# Altium PCB STM32F302VC_EVM.PcbDoc (part 11 of 19)
Units mil, origin at the board's own origin, x right, y up, seen from the top; angles counter-clockwise.
Board outline 3937.01 x 3937.01 mil, 2 copper layers (Top Layer, Bottom Layer); 117 components, 166 nets, 602 pads, 373 vias.
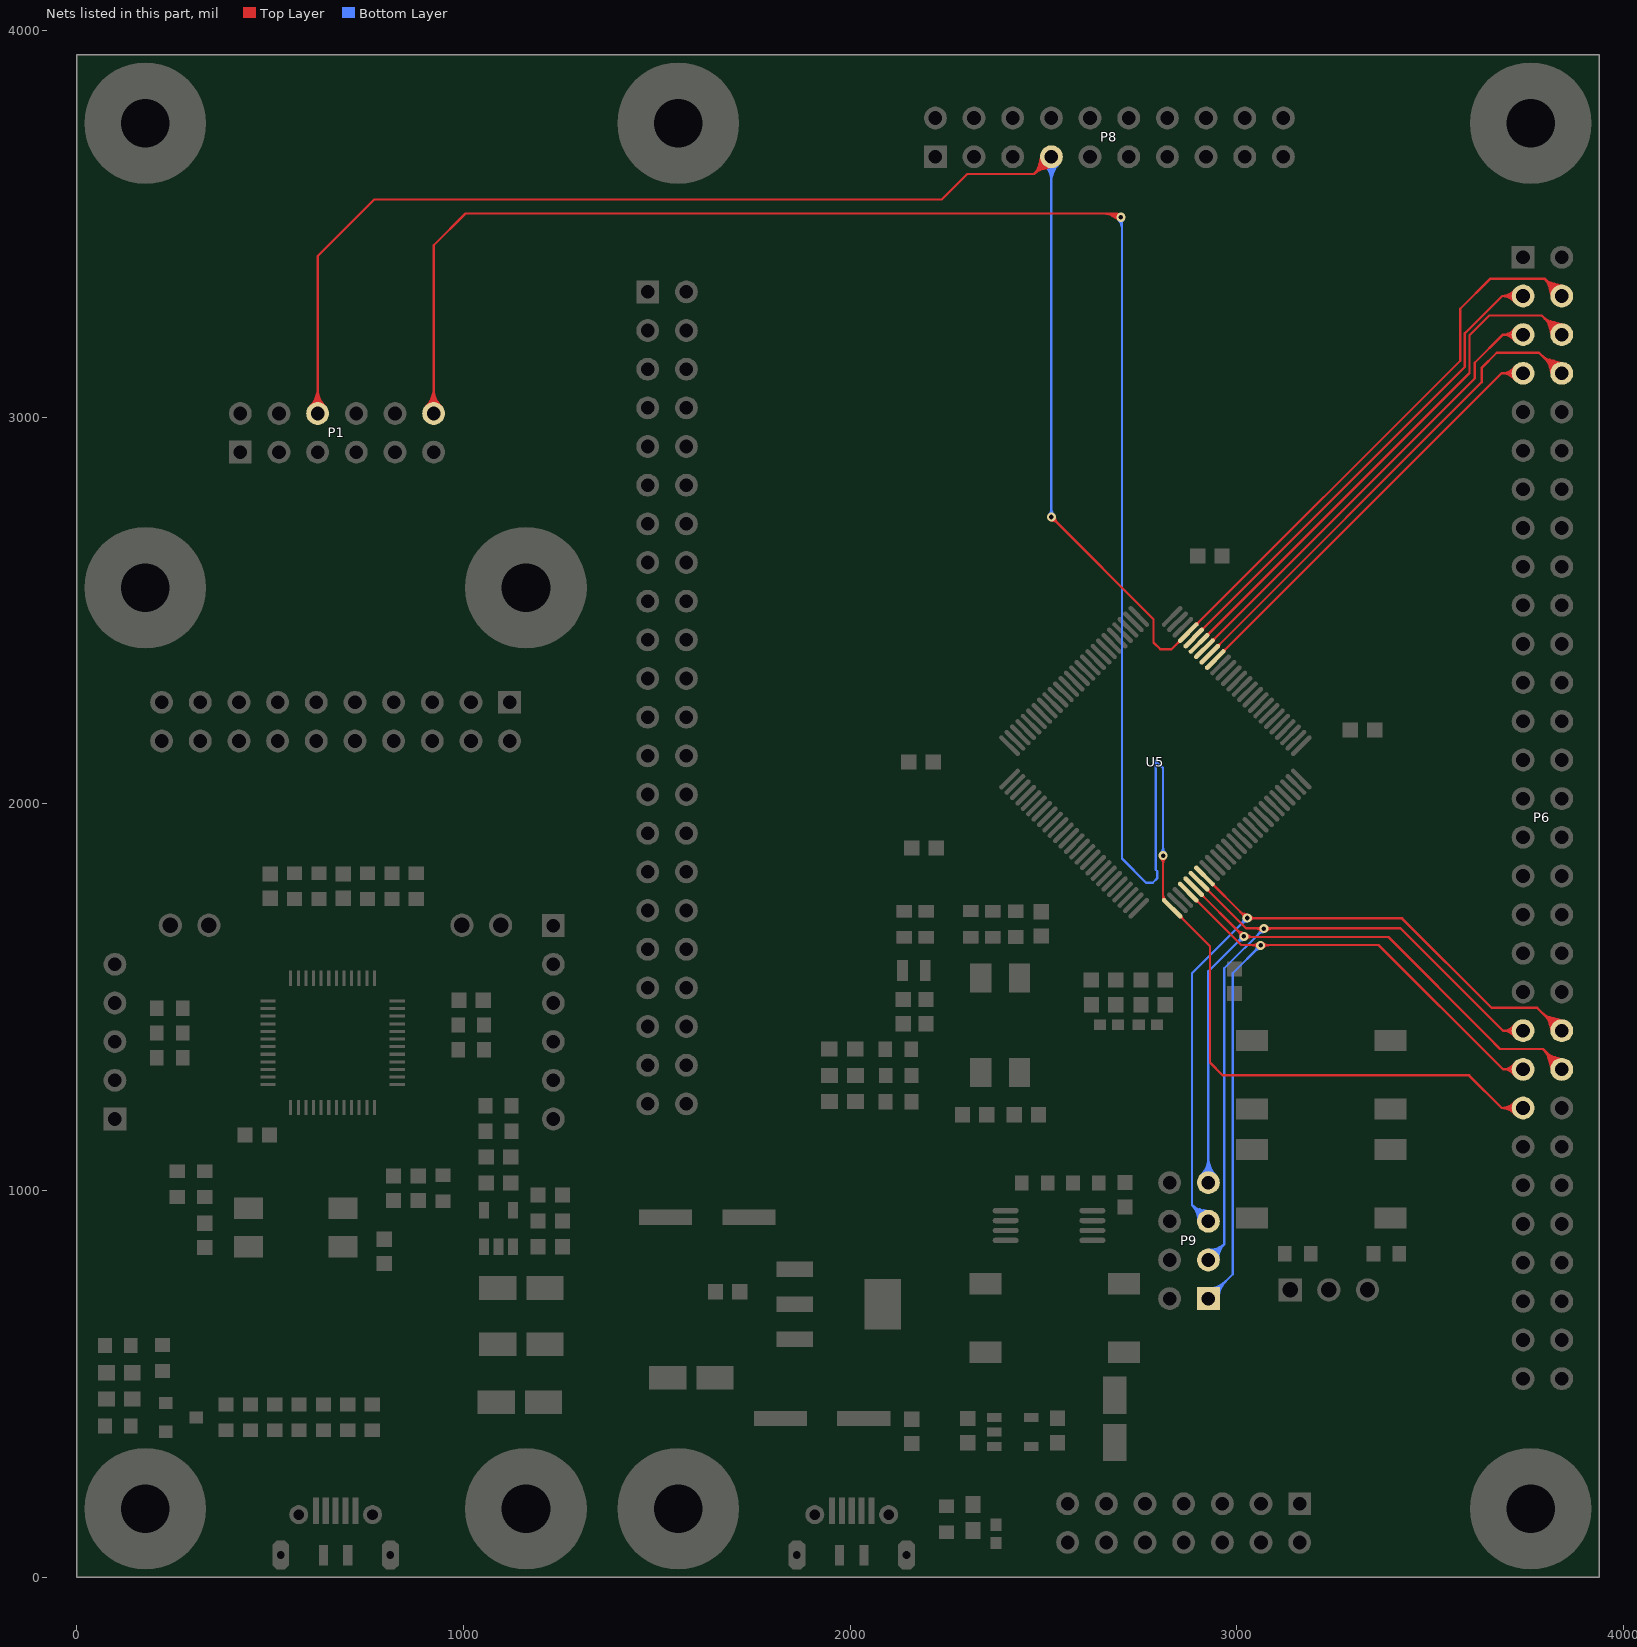
[diagram p11: the nets of this part, all layers, seen from the top]

## Via types
v1: diameter 23.62, hole 11.81, Top Layer to Bottom Layer, tented both sides, 372 vias
v2: diameter 50, hole 28, Top Layer to Bottom Layer, tented both sides, 1 vias

## Nets (pads, with @x,y where several pads share a name; then routed paths per layer and width w, separated by ;. In a path a pad name is that pad's centre, name@x,y a point inside that pad or via, vN(x,y) a via of type N, cw(c..) or ccw(c..) an arc to the next point about the centre after c; other vN are vias at no path point) (continued)
PA3: P1.12 P6.45 U5.26 | length 8220.1
  Top Layer w6: P1.12@922.83,3009.45 922.83,3444.49 1004.92,3526.57 2690.26,3526.57 ; v1(2699.93,3516.9) 2690.26,3526.57 ; v1(2809.06,1866.14) 2809.06,1753.53 U5.26@2832.52,1730.07 2930.68,1631.9 2930.68,1330.86 2963.73,1297.81 3600.57,1297.81 3685,1213.39 ; P6.45@3740.16,1213.39 3685,1213.39 ; P1.12@904.08,3028.21 ccw(c858.79,3073.49) 922.83,3073.49 ; P1.12@904.08,3028.21 ccw(c858.79,3073.49) 922.83,3073.49 ; P1.12@904.08,3028.21 ccw(c858.79,3073.49) 922.83,3073.49 ; P1.12@908.32,3023.96 ccw(c873.28,3059.01) 922.83,3059.01 ; P1.12@908.32,3023.96 ccw(c873.28,3059.01) 922.83,3059.01 ; P1.12@908.32,3023.96 ccw(c873.28,3059.01) 922.83,3059.01 ; P1.12@912.56,3019.72 ccw(c887.76,3044.52) 922.83,3044.52 ; P1.12@912.56,3019.72 ccw(c887.76,3044.52) 922.83,3044.52 ; P1.12@912.56,3019.72 ccw(c887.76,3044.52) 922.83,3044.52 ; 922.83,3044.52 ccw(c957.91,3044.52) P1.12@933.11,3019.72 ; 922.83,3044.52 ccw(c957.91,3044.52) P1.12@933.11,3019.72 ; 922.83,3044.52 ccw(c957.91,3044.52) P1.12@933.11,3019.72 ; 922.83,3059.01 ccw(c972.39,3059.01) P1.12@937.35,3023.96 ; 922.83,3059.01 ccw(c972.39,3059.01) P1.12@937.35,3023.96 ; 922.83,3059.01 ccw(c972.39,3059.01) P1.12@937.35,3023.96 ; 922.83,3073.49 ccw(c986.88,3073.49) P1.12@941.59,3028.21 ; 922.83,3073.49 ccw(c986.88,3073.49) P1.12@941.59,3028.21 ; 922.83,3073.49 ccw(c986.88,3073.49) P1.12@941.59,3028.21 ; 2655.32,3526.57 cw(c2655.32,3472.28) v1@2693.7,3510.67 ; 2655.32,3526.57 cw(c2655.32,3472.28) v1@2693.7,3510.67 ; 2655.32,3526.57 cw(c2655.32,3472.28) v1@2693.7,3510.67 ; 2669.8,3526.57 cw(c2669.8,3486.77) v1@2697.95,3514.92 ; 2669.8,3526.57 cw(c2669.8,3486.77) v1@2697.95,3514.92 ; 2669.8,3526.57 cw(c2669.8,3486.77) v1@2697.95,3514.92 ; 2675.77,3521.65 ccw(c2683.71,3534.63) v1@2693.99,3523.4 ; 2675.77,3521.65 ccw(c2683.71,3534.63) v1@2693.99,3523.4 ; 2675.77,3521.65 ccw(c2683.71,3534.63) v1@2693.99,3523.4 ; 2681.46,3524.43 ccw(c2688.41,3536.47) v1@2695.46,3524.5 ; 2681.46,3524.43 ccw(c2688.41,3536.47) v1@2695.46,3524.5 ; 2681.46,3524.43 ccw(c2688.41,3536.47) v1@2695.46,3524.5 ; 2682.57,3517.49 ccw(c2689.31,3528.51) v1@2698.04,3518.98 ; 2682.57,3517.49 ccw(c2689.31,3528.51) v1@2698.04,3518.98 ; 2682.57,3517.49 ccw(c2689.31,3528.51) v1@2698.04,3518.98 ; 2684.29,3526.57 cw(c2684.29,3501.26) v1@2702.19,3519.16 ; 2684.29,3526.57 cw(c2684.29,3501.26) v1@2702.19,3519.16 ; 2684.29,3526.57 cw(c2684.29,3501.26) v1@2702.19,3519.16 ; 2685.83,3521.91 cw(c2679.83,3511.52) v1@2691.42,3514.62 ; 2685.83,3521.91 cw(c2679.83,3511.52) v1@2691.42,3514.62 ; 2685.83,3521.91 cw(c2679.83,3511.52) v1@2691.42,3514.62 ; 2690.26,3526.57 cw(c2685.87,3522.18) v1@2691.69,3520 ; 2690.26,3526.57 ccw(c2694.65,3530.96) v1@2696.84,3525.15 ; 2690.26,3526.57 ccw(c2694.65,3530.96) v1@2696.84,3525.15 ; 2690.26,3526.57 cw(c2685.87,3522.18) v1@2691.69,3520 ; 2690.26,3526.57 ccw(c2694.65,3530.96) v1@2696.84,3525.15 ; 2690.26,3526.57 cw(c2685.87,3522.18) v1@2691.69,3520 ; v1@2802.82,1859.91 cw(c2787.78,1844.87) 2809.06,1844.87 ; v1@2802.82,1859.91 cw(c2787.78,1844.87) 2809.06,1844.87 ; v1@2802.82,1859.91 cw(c2787.78,1844.87) 2809.06,1844.87 ; 2809.06,1764.2 ccw(c2824.9,1764.2) U5.26@2813.7,1753 ; 2809.06,1764.2 ccw(c2824.9,1764.2) U5.26@2813.7,1753 ; 2809.06,1764.2 ccw(c2824.9,1764.2) U5.26@2813.7,1753 ; 2809.06,1844.87 cw(c2830.33,1844.87) v1@2815.29,1859.91 ; 2809.06,1844.87 cw(c2830.33,1844.87) v1@2815.29,1859.91 ; 2809.06,1844.87 cw(c2830.33,1844.87) v1@2815.29,1859.91 ; U5.26@2809.62,1753.03 ccw(c2806.37,1756.37) 2810.41,1758.7 ; U5.26@2809.62,1753.03 ccw(c2806.37,1756.37) 2810.41,1758.7 ; U5.26@2809.62,1753.03 ccw(c2806.37,1756.37) 2810.41,1758.7 ; U5.26@2853.4,1706.28 cw(c2853.4,1699.27) 2858.36,1704.23 ; U5.26@2853.4,1706.28 cw(c2853.4,1699.27) 2858.36,1704.23 ; U5.26@2853.4,1706.28 cw(c2853.4,1699.27) 2858.36,1704.23 ; U5.26@2856.3,1709.19 ccw(c2863.32,1709.19) 2858.36,1704.23 ; U5.26@2856.3,1709.19 ccw(c2863.32,1709.19) 2858.36,1704.23 ; U5.26@2856.3,1709.19 ccw(c2863.32,1709.19) 2858.36,1704.23 ; 3685,1213.39 cw(c3685,1169.31) P6.45@3719.43,1196.82 ; 3685,1213.39 ccw(c3685,1257.46) P6.45@3719.43,1229.95 ; 3685,1213.39 ccw(c3685,1257.46) P6.45@3719.43,1229.95 ; 3685,1213.39 cw(c3685,1169.31) P6.45@3719.43,1196.82 ; 3685,1213.39 ccw(c3685,1257.46) P6.45@3719.43,1229.95 ; 3685,1213.39 cw(c3685,1169.31) P6.45@3719.43,1196.82 ; 3697.48,1213.39 cw(c3697.48,1179.28) P6.45@3724.12,1200.57 ; 3697.48,1213.39 ccw(c3697.48,1247.49) P6.45@3724.12,1226.2 ; 3697.48,1213.39 ccw(c3697.48,1247.49) P6.45@3724.12,1226.2 ; 3697.48,1213.39 cw(c3697.48,1179.28) P6.45@3724.12,1200.57 ; 3697.48,1213.39 ccw(c3697.48,1247.49) P6.45@3724.12,1226.2 ; 3697.48,1213.39 cw(c3697.48,1179.28) P6.45@3724.12,1200.57 ; 3709.95,1213.39 cw(c3709.95,1189.25) P6.45@3728.81,1204.32 ; 3709.95,1213.39 ccw(c3709.95,1237.53) P6.45@3728.81,1222.46 ; 3709.95,1213.39 ccw(c3709.95,1237.53) P6.45@3728.81,1222.46 ; 3709.95,1213.39 cw(c3709.95,1189.25) P6.45@3728.81,1204.32 ; 3709.95,1213.39 ccw(c3709.95,1237.53) P6.45@3728.81,1222.46 ; 3709.95,1213.39 cw(c3709.95,1189.25) P6.45@3728.81,1204.32
  Bottom Layer w6: v1(2699.93,3516.9) 2700.75,3517.72 2702.76,3515.71 2702.76,1858.36 2765,1796.12 2782.24,1796.12 2794.43,1808.31 2794.43,1825.55 2790.35,1829.63 2790.35,2111.38 2809.06,2092.68 v1(2809.06,1866.14) ; v1@2693.7,3510.67 cw(c2671.85,3488.82) 2702.76,3488.82 ; v1@2693.7,3510.67 cw(c2671.85,3488.82) 2702.76,3488.82 ; v1@2693.7,3510.67 cw(c2671.85,3488.82) 2702.76,3488.82 ; v1@2697.95,3514.92 cw(c2686.34,3503.31) 2702.76,3503.31 ; v1@2697.95,3514.92 cw(c2686.34,3503.31) 2702.76,3503.31 ; v1@2697.95,3514.92 cw(c2686.34,3503.31) 2702.76,3503.31 ; 2702.76,3502.44 cw(c2714.4,3502.44) v1@2706.17,3510.67 ; 2702.76,3502.44 cw(c2714.4,3502.44) v1@2706.17,3510.67 ; 2702.76,3502.44 cw(c2714.4,3502.44) v1@2706.17,3510.67 ; v1@2802.82,1872.37 ccw(c2787.78,1887.41) 2809.06,1887.41 ; v1@2802.82,1872.37 ccw(c2787.78,1887.41) 2809.06,1887.41 ; v1@2802.82,1872.37 ccw(c2787.78,1887.41) 2809.06,1887.41 ; 2809.06,1887.41 ccw(c2830.33,1887.41) v1@2815.29,1872.37 ; 2809.06,1887.41 ccw(c2830.33,1887.41) v1@2815.29,1872.37 ; 2809.06,1887.41 ccw(c2830.33,1887.41) v1@2815.29,1872.37
PA4: P6.43 P9.1 U5.29 | length 3440.3
  Top Layer w6: U5.29@2874.28,1771.83 3011.26,1634.84 3366.54,1634.84 3687.99,1313.39 ; P6.43@3740.16,1313.39 3687.99,1313.39 ; U5.29@2895.16,1748.04 cw(c2895.16,1741.03) 2900.12,1745.99 ; U5.29@2895.16,1748.04 cw(c2895.16,1741.03) 2900.12,1745.99 ; U5.29@2895.16,1748.04 cw(c2895.16,1741.03) 2900.12,1745.99 ; U5.29@2898.06,1750.95 ccw(c2905.08,1750.95) 2900.12,1745.99 ; U5.29@2898.06,1750.95 ccw(c2905.08,1750.95) 2900.12,1745.99 ; U5.29@2898.06,1750.95 ccw(c2905.08,1750.95) 2900.12,1745.99 ; 3037.72,1634.84 cw(c3037.72,1610.48) v1@3054.94,1627.71 ; 3037.72,1634.84 cw(c3037.72,1610.48) v1@3054.94,1627.71 ; 3037.72,1634.84 cw(c3037.72,1610.48) v1@3054.94,1627.71 ; 3042.09,1634.84 ccw(c3042.09,1653.03) v1@3054.94,1640.17 ; 3042.09,1634.84 ccw(c3042.09,1653.03) v1@3054.94,1640.17 ; 3042.09,1634.84 ccw(c3042.09,1653.03) v1@3054.94,1640.17 ; v1@3067.4,1627.71 cw(c3084.63,1610.48) 3084.63,1634.84 ; v1@3067.4,1627.71 cw(c3084.63,1610.48) 3084.63,1634.84 ; v1@3067.4,1627.71 cw(c3084.63,1610.48) 3084.63,1634.84 ; v1@3067.4,1640.17 ccw(c3080.26,1653.03) 3080.26,1634.84 ; v1@3067.4,1640.17 ccw(c3080.26,1653.03) 3080.26,1634.84 ; v1@3067.4,1640.17 ccw(c3080.26,1653.03) 3080.26,1634.84 ; 3687.99,1313.39 cw(c3687.99,1275.36) P6.43@3718.72,1297.76 ; 3687.99,1313.39 ccw(c3687.99,1351.41) P6.43@3718.72,1329.01 ; 3687.99,1313.39 ccw(c3687.99,1351.41) P6.43@3718.72,1329.01 ; 3687.99,1313.39 cw(c3687.99,1275.36) P6.43@3718.72,1297.76 ; 3687.99,1313.39 ccw(c3687.99,1351.41) P6.43@3718.72,1329.01 ; 3687.99,1313.39 cw(c3687.99,1275.36) P6.43@3718.72,1297.76 ; 3699.79,1313.39 cw(c3699.79,1283.96) P6.43@3723.57,1301.29 ; 3699.79,1313.39 ccw(c3699.79,1342.81) P6.43@3723.57,1325.48 ; 3699.79,1313.39 ccw(c3699.79,1342.81) P6.43@3723.57,1325.48 ; 3699.79,1313.39 cw(c3699.79,1283.96) P6.43@3723.57,1301.29 ; 3699.79,1313.39 ccw(c3699.79,1342.81) P6.43@3723.57,1325.48 ; 3699.79,1313.39 cw(c3699.79,1283.96) P6.43@3723.57,1301.29
  Bottom Layer w6: P9.1@2926.18,720.47 2989.17,783.46 2989.17,1561.94 v1(3061.17,1633.94) ; P9.1@2926.18,735 ccw(c2926.18,770.07) P9.1@2950.98,745.27 ; P9.1@2926.18,735 ccw(c2926.18,770.07) P9.1@2950.98,745.27 ; P9.1@2926.18,735 ccw(c2926.18,770.07) P9.1@2950.98,745.27 ; P9.1@2926.18,741 ccw(c2926.18,790.56) 2961.22,755.52 ; P9.1@2926.18,741 ccw(c2926.18,790.56) 2961.22,755.52 ; P9.1@2926.18,741 ccw(c2926.18,790.56) 2961.22,755.52 ; P9.1@2926.18,747 ccw(c2926.18,811.04) 2971.47,765.76 ; P9.1@2926.18,747 ccw(c2926.18,811.04) 2971.47,765.76 ; P9.1@2926.18,747 ccw(c2926.18,811.04) 2971.47,765.76 ; P9.1@2940.71,720.47 cw(c2975.78,720.47) P9.1@2950.98,745.27 ; P9.1@2940.71,720.47 cw(c2975.78,720.47) P9.1@2950.98,745.27 ; P9.1@2940.71,720.47 cw(c2975.78,720.47) P9.1@2950.98,745.27 ; P9.1@2946.71,720.47 cw(c2996.27,720.47) 2961.22,755.52 ; P9.1@2946.71,720.47 cw(c2996.27,720.47) 2961.22,755.52 ; P9.1@2946.71,720.47 cw(c2996.27,720.47) 2961.22,755.52 ; P9.1@2952.71,720.47 cw(c3016.75,720.47) 2971.47,765.76 ; P9.1@2952.71,720.47 cw(c3016.75,720.47) 2971.47,765.76 ; P9.1@2952.71,720.47 cw(c3016.75,720.47) 2971.47,765.76 ; 3046.13,1618.9 cw(c3061.17,1603.86) v1@3061.17,1625.13 ; 3046.13,1618.9 ccw(c3031.09,1633.94) v1@3052.36,1633.94 ; 3046.13,1618.9 ccw(c3031.09,1633.94) v1@3052.36,1633.94 ; 3046.13,1618.9 cw(c3061.17,1603.86) v1@3061.17,1625.13 ; 3046.13,1618.9 ccw(c3031.09,1633.94) v1@3052.36,1633.94 ; 3046.13,1618.9 cw(c3061.17,1603.86) v1@3061.17,1625.13
PA5: P6.44 P9.7 U5.30 | length 4667.8
  Top Layer w6: U5.30@2888.2,1785.74 3018.43,1655.51 3391.73,1655.51 3649.46,1397.78 3649.46,1397.43 3680.75,1366.14 3791.34,1366.14 P6.44@3842.13,1315.35 ; U5.30@2909.08,1761.96 cw(c2909.08,1754.95) 2914.04,1759.91 ; U5.30@2909.08,1761.96 cw(c2909.08,1754.95) 2914.04,1759.91 ; U5.30@2909.08,1761.96 cw(c2909.08,1754.95) 2914.04,1759.91 ; U5.30@2911.98,1764.87 ccw(c2919,1764.87) 2914.04,1759.91 ; U5.30@2911.98,1764.87 ccw(c2919,1764.87) 2914.04,1759.91 ; U5.30@2911.98,1764.87 ccw(c2919,1764.87) 2914.04,1759.91 ; 3000.44,1673.51 ccw(c3018.2,1691.26) v1@3018.2,1666.15 ; 3000.44,1673.51 ccw(c3018.2,1691.26) v1@3018.2,1666.15 ; 3000.44,1673.51 ccw(c3018.2,1691.26) v1@3018.2,1666.15 ; 3004.28,1669.66 cw(c2991.96,1657.34) v1@3009.38,1657.34 ; 3004.28,1669.66 cw(c2991.96,1657.34) v1@3009.38,1657.34 ; 3004.28,1669.66 cw(c2991.96,1657.34) v1@3009.38,1657.34 ; 3011.49,1667.95 cw(c3007.91,1654.58) v1@3021.28,1658.17 ; 3011.49,1667.95 cw(c3007.91,1654.58) v1@3021.28,1658.17 ; 3011.49,1667.95 cw(c3007.91,1654.58) v1@3021.28,1658.17 ; v1@3024.43,1651.11 cw(c3035.06,1640.48) 3035.06,1655.51 ; v1@3024.43,1651.11 cw(c3035.06,1640.48) 3035.06,1655.51 ; v1@3024.43,1651.11 cw(c3035.06,1640.48) 3035.06,1655.51 ; v1@3024.43,1663.57 ccw(c3043.88,1683.02) 3043.88,1655.51 ; v1@3024.43,1663.57 ccw(c3043.88,1683.02) 3043.88,1655.51 ; v1@3024.43,1663.57 ccw(c3043.88,1683.02) 3043.88,1655.51 ; 3792.09,1365.39 cw(c3740.08,1313.39) P6.44@3813.63,1313.39 ; 3792.09,1365.39 cw(c3740.08,1313.39) P6.44@3813.63,1313.39 ; 3792.09,1365.39 cw(c3740.08,1313.39) P6.44@3813.63,1313.39 ; 3801.59,1355.89 ccw(c3840.16,1394.45) P6.44@3840.16,1339.91 ; 3801.59,1355.89 ccw(c3840.16,1394.45) P6.44@3840.16,1339.91 ; 3801.59,1355.89 ccw(c3840.16,1394.45) P6.44@3840.16,1339.91 ; 3802.33,1355.15 cw(c3760.57,1313.39) P6.44@3819.63,1313.39 ; 3802.33,1355.15 cw(c3760.57,1313.39) P6.44@3819.63,1313.39 ; 3802.33,1355.15 cw(c3760.57,1313.39) P6.44@3819.63,1313.39 ; 3805.59,1343.4 ccw(c3851.02,1355.57) P6.44@3839.29,1310.02 ; 3805.59,1343.4 ccw(c3851.02,1355.57) P6.44@3839.29,1310.02 ; 3805.59,1343.4 ccw(c3851.02,1355.57) P6.44@3839.29,1310.02 ; 3808.25,1333.47 ccw(c3848.08,1344.14) P6.44@3837.8,1304.21 ; 3808.25,1333.47 ccw(c3848.08,1344.14) P6.44@3837.8,1304.21 ; 3808.25,1333.47 ccw(c3848.08,1344.14) P6.44@3837.8,1304.21 ; 3810.91,1323.55 ccw(c3845.14,1332.72) P6.44@3836.3,1298.4 ; 3810.91,1323.55 ccw(c3845.14,1332.72) P6.44@3836.3,1298.4 ; 3810.91,1323.55 ccw(c3845.14,1332.72) P6.44@3836.3,1298.4 ; 3811.84,1345.64 ccw(c3840.16,1373.97) P6.44@3840.16,1333.91 ; 3811.84,1345.64 ccw(c3840.16,1373.97) P6.44@3840.16,1333.91 ; 3811.84,1345.64 ccw(c3840.16,1373.97) P6.44@3840.16,1333.91 ; 3812.24,1340.97 ccw(c3845.37,1349.85) P6.44@3840.52,1315.89 ; 3812.24,1340.97 ccw(c3845.37,1349.85) P6.44@3840.52,1315.89 ; 3812.24,1340.97 ccw(c3845.37,1349.85) P6.44@3840.52,1315.89 ; 3812.57,1344.91 cw(c3781.05,1313.39) P6.44@3825.63,1313.39 ; 3812.57,1344.91 cw(c3781.05,1313.39) P6.44@3825.63,1313.39 ; 3812.57,1344.91 cw(c3781.05,1313.39) P6.44@3825.63,1313.39 ; 3814.18,1346.87 cw(c3803.76,1307.98) P6.44@3843.59,1313.9 ; 3814.18,1346.87 cw(c3803.76,1307.98) P6.44@3843.59,1313.9 ; 3814.18,1346.87 cw(c3803.76,1307.98) P6.44@3843.59,1313.9 ; 3814.59,1332.19 ccw(c3843.97,1340.06) P6.44@3839.67,1309.95 ; 3814.59,1332.19 ccw(c3843.97,1340.06) P6.44@3839.67,1309.95 ; 3814.59,1332.19 ccw(c3843.97,1340.06) P6.44@3839.67,1309.95 ; 3819.24,1337.23 ccw(c3839.22,1342.58) P6.44@3839.88,1321.91 ; 3819.24,1337.23 ccw(c3839.22,1342.58) P6.44@3839.88,1321.91 ; 3819.24,1337.23 ccw(c3839.22,1342.58) P6.44@3839.88,1321.91 ; 3823.01,1344.51 cw(c3813.62,1309.44) P6.44@3849.53,1314.78 ; 3823.01,1344.51 cw(c3813.62,1309.44) P6.44@3849.53,1314.78 ; 3823.01,1344.51 cw(c3813.62,1309.44) P6.44@3849.53,1314.78 ; 3831.85,1342.14 cw(c3823.48,1310.91) P6.44@3855.46,1315.66 ; 3831.85,1342.14 cw(c3823.48,1310.91) P6.44@3855.46,1315.66 ; 3831.85,1342.14 cw(c3823.48,1310.91) P6.44@3855.46,1315.66
  Bottom Layer w6: P9.7@2926.18,1020.47 2926.18,1566.66 3016.86,1657.34 v1(3018.2,1657.34) ; P9.7@2907.42,1039.23 ccw(c2862.14,1084.52) 2926.18,1084.52 ; P9.7@2907.42,1039.23 ccw(c2862.14,1084.52) 2926.18,1084.52 ; P9.7@2907.42,1039.23 ccw(c2862.14,1084.52) 2926.18,1084.52 ; P9.7@2911.67,1034.99 ccw(c2876.62,1070.03) 2926.18,1070.03 ; P9.7@2911.67,1034.99 ccw(c2876.62,1070.03) 2926.18,1070.03 ; P9.7@2911.67,1034.99 ccw(c2876.62,1070.03) 2926.18,1070.03 ; P9.7@2915.91,1030.74 ccw(c2891.11,1055.54) 2926.18,1055.54 ; P9.7@2915.91,1030.74 ccw(c2891.11,1055.54) 2926.18,1055.54 ; P9.7@2915.91,1030.74 ccw(c2891.11,1055.54) 2926.18,1055.54 ; 2926.18,1055.54 ccw(c2961.25,1055.54) P9.7@2936.45,1030.74 ; 2926.18,1055.54 ccw(c2961.25,1055.54) P9.7@2936.45,1030.74 ; 2926.18,1055.54 ccw(c2961.25,1055.54) P9.7@2936.45,1030.74 ; 2926.18,1070.03 ccw(c2975.74,1070.03) P9.7@2940.7,1034.99 ; 2926.18,1070.03 ccw(c2975.74,1070.03) P9.7@2940.7,1034.99 ; 2926.18,1070.03 ccw(c2975.74,1070.03) P9.7@2940.7,1034.99 ; 2926.18,1084.52 ccw(c2990.22,1084.52) P9.7@2944.94,1039.23 ; 2926.18,1084.52 ccw(c2990.22,1084.52) P9.7@2944.94,1039.23 ; 2926.18,1084.52 ccw(c2990.22,1084.52) P9.7@2944.94,1039.23 ; 3000.88,1641.35 cw(c3018.2,1624.03) v1@3018.2,1648.53 ; 3000.88,1641.35 cw(c3018.2,1624.03) v1@3018.2,1648.53 ; 3000.88,1641.35 cw(c3018.2,1624.03) v1@3018.2,1648.53 ; 3004.1,1644.58 ccw(c2991.34,1657.34) v1@3009.39,1657.34 ; 3004.1,1644.58 ccw(c2991.34,1657.34) v1@3009.39,1657.34 ; 3004.1,1644.58 ccw(c2991.34,1657.34) v1@3009.39,1657.34 ; 3011.58,1646.76 ccw(c3008.05,1659.96) v1@3021.28,1656.54 ; 3011.58,1646.76 ccw(c3008.05,1659.96) v1@3021.28,1656.54 ; 3011.58,1646.76 ccw(c3008.05,1659.96) v1@3021.28,1656.54
PA6: P6.41 P9.3 U5.31 | length 3235.8
  Top Layer w6: U5.31@2902.12,1799.66 3023.63,1678.15 3423.23,1678.15 3687.99,1413.39 ; P6.41@3740.16,1413.39 3687.99,1413.39 ; U5.31@2923,1775.88 cw(c2923,1768.86) 2927.96,1773.83 ; U5.31@2923,1775.88 cw(c2923,1768.86) 2927.96,1773.83 ; U5.31@2923,1775.88 cw(c2923,1768.86) 2927.96,1773.83 ; U5.31@2925.9,1778.78 ccw(c2932.92,1778.78) 2927.96,1773.82 ; U5.31@2925.9,1778.78 ccw(c2932.92,1778.78) 2927.96,1773.82 ; U5.31@2925.9,1778.78 ccw(c2932.92,1778.78) 2927.96,1773.82 ; 3046.23,1678.15 cw(c3046.23,1653.52) v1@3063.65,1670.94 ; 3046.23,1678.15 cw(c3046.23,1653.52) v1@3063.65,1670.94 ; 3046.23,1678.15 cw(c3046.23,1653.52) v1@3063.65,1670.94 ; 3050.99,1678.15 ccw(c3050.99,1696.06) v1@3063.65,1683.4 ; 3050.99,1678.15 ccw(c3050.99,1696.06) v1@3063.65,1683.4 ; 3050.99,1678.15 ccw(c3050.99,1696.06) v1@3063.65,1683.4 ; v1@3076.11,1670.94 cw(c3093.53,1653.52) 3093.53,1678.15 ; v1@3076.11,1670.94 cw(c3093.53,1653.52) 3093.53,1678.15 ; v1@3076.11,1670.94 cw(c3093.53,1653.52) 3093.53,1678.15 ; v1@3076.11,1683.4 ccw(c3088.78,1696.06) 3088.78,1678.15 ; v1@3076.11,1683.4 ccw(c3088.78,1696.06) 3088.78,1678.15 ; v1@3076.11,1683.4 ccw(c3088.78,1696.06) 3088.78,1678.15 ; 3687.99,1413.39 cw(c3687.99,1375.36) P6.41@3718.72,1397.76 ; 3687.99,1413.39 ccw(c3687.99,1451.41) P6.41@3718.72,1429.01 ; 3687.99,1413.39 ccw(c3687.99,1451.41) P6.41@3718.72,1429.01 ; 3687.99,1413.39 cw(c3687.99,1375.36) P6.41@3718.72,1397.76 ; 3687.99,1413.39 ccw(c3687.99,1451.41) P6.41@3718.72,1429.01 ; 3687.99,1413.39 cw(c3687.99,1375.36) P6.41@3718.72,1397.76 ; 3699.79,1413.39 cw(c3699.79,1383.96) P6.41@3723.57,1401.29 ; 3699.79,1413.39 ccw(c3699.79,1442.81) P6.41@3723.57,1425.48 ; 3699.79,1413.39 ccw(c3699.79,1442.81) P6.41@3723.57,1425.48 ; 3699.79,1413.39 cw(c3699.79,1383.96) P6.41@3723.57,1401.29 ; 3699.79,1413.39 ccw(c3699.79,1442.81) P6.41@3723.57,1425.48 ; 3699.79,1413.39 cw(c3699.79,1383.96) P6.41@3723.57,1401.29
  Bottom Layer w6: P9.3@2926.18,820.47 2967.52,861.81 ; v1(3069.88,1677.17) 2967.52,1574.8 2967.52,861.81 ; P9.3@2927.15,834.97 ccw(c2929.01,862.92) 2948.82,843.11 ; P9.3@2927.15,834.97 ccw(c2929.01,862.92) 2948.82,843.11 ; P9.3@2927.15,834.97 ccw(c2929.01,862.92) 2948.82,843.11 ; P9.3@2927.55,840.95 ccw(c2930.18,880.45) 2958.17,852.46 ; P9.3@2927.55,840.95 ccw(c2930.18,880.45) 2958.17,852.46 ; P9.3@2927.55,840.95 ccw(c2930.18,880.45) 2958.17,852.46 ; P9.3@2927.95,846.94 ccw(c2931.35,897.98) 2967.52,861.81 ; P9.3@2927.95,846.94 ccw(c2931.35,897.98) 2967.52,861.81 ; P9.3@2927.95,846.94 ccw(c2931.35,897.98) 2967.52,861.81 ; P9.3@2940.68,821.44 cw(c2968.63,823.3) 2948.82,843.11 ; P9.3@2940.68,821.44 cw(c2968.63,823.3) 2948.82,843.11 ; P9.3@2940.68,821.44 cw(c2968.63,823.3) 2948.82,843.11 ; P9.3@2946.66,821.84 cw(c2986.16,824.47) 2958.17,852.46 ; P9.3@2946.66,821.84 cw(c2986.16,824.47) 2958.17,852.46 ; P9.3@2946.66,821.84 cw(c2986.16,824.47) 2958.17,852.46 ; P9.3@2952.65,822.24 cw(c3003.69,825.64) 2967.52,861.81 ; P9.3@2952.65,822.24 cw(c3003.69,825.64) 2967.52,861.81 ; P9.3@2952.65,822.24 cw(c3003.69,825.64) 2967.52,861.81 ; 3054.84,1662.12 cw(c3069.88,1647.08) v1@3069.88,1668.35 ; 3054.84,1662.12 ccw(c3039.8,1677.17) v1@3061.07,1677.17 ; 3054.84,1662.12 ccw(c3039.8,1677.17) v1@3061.07,1677.17 ; 3054.84,1662.12 cw(c3069.88,1647.08) v1@3069.88,1668.35 ; 3054.84,1662.12 ccw(c3039.8,1677.17) v1@3061.07,1677.17 ; 3054.84,1662.12 cw(c3069.88,1647.08) v1@3069.88,1668.35
PA7: P6.42 P9.5 U5.32 | length 5135.4
  Top Layer w6: U5.32@2916.04,1813.58 v1@3025.77,1703.85 ; v1@3026.72,1703.74 3427.35,1703.74 3658.46,1472.63 3776.39,1472.63 P6.42@3837.89,1411.12 ; U5.32@2936.92,1789.8 cw(c2936.92,1782.78) 2941.88,1787.74 ; U5.32@2936.92,1789.8 cw(c2936.92,1782.78) 2941.88,1787.74 ; U5.32@2936.92,1789.8 cw(c2936.92,1782.78) 2941.88,1787.74 ; U5.32@2939.82,1792.7 ccw(c2946.84,1792.7) 2941.88,1787.74 ; U5.32@2939.82,1792.7 ccw(c2946.84,1792.7) 2941.88,1787.74 ; U5.32@2939.82,1792.7 ccw(c2946.84,1792.7) 2941.88,1787.74 ; 3008.42,1721.2 ccw(c3026.72,1739.5) v1@3026.72,1713.62 ; 3008.42,1721.2 ccw(c3026.72,1739.5) v1@3026.72,1713.62 ; 3008.42,1721.2 ccw(c3026.72,1739.5) v1@3026.72,1713.62 ; 3013.03,1716.59 cw(c3001.25,1704.81) v1@3017.91,1704.81 ; 3013.03,1716.59 cw(c3001.25,1704.81) v1@3017.91,1704.81 ; 3013.03,1716.59 cw(c3001.25,1704.81) v1@3017.91,1704.81 ; 3019.9,1715.45 cw(c3016.26,1701.87) v1@3029.79,1705.67 ; 3019.9,1715.45 cw(c3016.26,1701.87) v1@3029.79,1705.67 ; 3019.9,1715.45 cw(c3016.26,1701.87) v1@3029.79,1705.67 ; v1@3032.95,1698.58 cw(c3045.42,1686.11) 3045.42,1703.74 ; v1@3032.95,1698.58 cw(c3045.42,1686.11) 3045.42,1703.74 ; v1@3032.95,1698.58 cw(c3045.42,1686.11) 3045.42,1703.74 ; v1@3032.95,1711.04 ccw(c3050.57,1728.66) 3050.57,1703.74 ; v1@3032.95,1711.04 ccw(c3050.57,1728.66) 3050.57,1703.74 ; v1@3032.95,1711.04 ccw(c3050.57,1728.66) 3050.57,1703.74 ; 3787.14,1461.87 ccw(c3840.16,1514.89) P6.42@3840.16,1439.91 ; 3787.14,1461.87 ccw(c3840.16,1514.89) P6.42@3840.16,1439.91 ; 3787.14,1461.87 ccw(c3840.16,1514.89) P6.42@3840.16,1439.91 ; 3797.39,1451.63 ccw(c3840.16,1494.4) P6.42@3840.16,1433.91 ; 3797.39,1451.63 ccw(c3840.16,1494.4) P6.42@3840.16,1433.91 ; 3797.39,1451.63 ccw(c3840.16,1494.4) P6.42@3840.16,1433.91 ; 3798.07,1450.94 cw(c3760.52,1413.39) P6.42@3813.63,1413.39 ; 3798.07,1450.94 cw(c3760.52,1413.39) P6.42@3813.63,1413.39 ; 3798.07,1450.94 cw(c3760.52,1413.39) P6.42@3813.63,1413.39 ; 3799.84,1450.72 cw(c3785.98,1399.02) P6.42@3837.71,1412.74 ; 3799.84,1450.72 cw(c3785.98,1399.02) P6.42@3837.71,1412.74 ; 3799.84,1450.72 cw(c3785.98,1399.02) P6.42@3837.71,1412.74 ; 3806.75,1439.06 ccw(c3845.19,1449.36) P6.42@3839.68,1409.95 ; 3806.75,1439.06 ccw(c3845.19,1449.36) P6.42@3839.68,1409.95 ; 3806.75,1439.06 ccw(c3845.19,1449.36) P6.42@3839.68,1409.95 ; 3807.63,1441.39 ccw(c3840.16,1473.92) P6.42@3840.16,1427.91 ; 3807.63,1441.39 ccw(c3840.16,1473.92) P6.42@3840.16,1427.91 ; 3807.63,1441.39 ccw(c3840.16,1473.92) P6.42@3840.16,1427.91 ; 3808.32,1440.7 cw(c3781,1413.39) P6.42@3819.63,1413.39 ; 3808.32,1440.7 cw(c3781,1413.39) P6.42@3819.63,1413.39 ; 3808.32,1440.7 cw(c3781,1413.39) P6.42@3819.63,1413.39 ; 3809.1,1430.31 ccw(c3843.83,1439.61) P6.42@3838.85,1404 ; 3809.1,1430.31 ccw(c3843.83,1439.61) P6.42@3838.85,1404 ; 3809.1,1430.31 ccw(c3843.83,1439.61) P6.42@3838.85,1404 ; 3809.84,1448.04 cw(c3797.53,1402.09) P6.42@3843.51,1414.28 ; 3809.84,1448.04 cw(c3797.53,1402.09) P6.42@3843.51,1414.28 ; 3809.84,1448.04 cw(c3797.53,1402.09) P6.42@3843.51,1414.28 ; 3811.44,1421.56 ccw(c3842.46,1429.87) P6.42@3838.01,1398.06 ; 3811.44,1421.56 ccw(c3842.46,1429.87) P6.42@3838.01,1398.06 ; 3811.44,1421.56 ccw(c3842.46,1429.87) P6.42@3838.01,1398.06 ; 3812.23,1441.4 cw(c3803.21,1407.74) P6.42@3837.66,1413 ; 3812.23,1441.4 cw(c3803.21,1407.74) P6.42@3837.66,1413 ; 3812.23,1441.4 cw(c3803.21,1407.74) P6.42@3837.66,1413 ; 3814.65,1434.75 ccw(c3818.83,1450.33) P6.42@3826.89,1436.36 ; 3814.65,1434.75 ccw(c3818.83,1450.33) P6.42@3826.89,1436.36 ; 3814.65,1434.75 ccw(c3818.83,1450.33) P6.42@3826.89,1436.36 ; 3815.92,1434.41 cw(c3810.43,1413.93) P6.42@3831.63,1413.54 ; 3815.92,1434.41 cw(c3810.43,1413.93) P6.42@3831.63,1413.54 ; 3815.92,1434.41 cw(c3810.43,1413.93) P6.42@3831.63,1413.54 ; 3819.85,1445.35 cw(c3809.08,1405.15) P6.42@3849.31,1415.81 ; 3819.85,1445.35 cw(c3809.08,1405.15) P6.42@3849.31,1415.81 ; 3819.85,1445.35 cw(c3809.08,1405.15) P6.42@3849.31,1415.81 ; 3821.1,1439.02 cw(c3813.13,1409.25) P6.42@3843.59,1413.91 ; 3821.1,1439.02 cw(c3813.13,1409.25) P6.42@3843.59,1413.91 ; 3821.1,1439.02 cw(c3813.13,1409.25) P6.42@3843.59,1413.91 ; 3829.86,1442.67 cw(c3820.62,1408.21) P6.42@3855.11,1417.35 ; 3829.86,1442.67 cw(c3820.62,1408.21) P6.42@3855.11,1417.35 ; 3829.86,1442.67 cw(c3820.62,1408.21) P6.42@3855.11,1417.35
  Bottom Layer w6: P9.5@2926.18,920.47 2883.86,962.8 ; v1(3026.72,1704.81) 3026.72,1704.58 2883.86,1561.72 2883.86,962.8 ; 2883.86,962.79 cw(c2845.5,924.43) P9.5@2899.69,921.77 ; 2883.86,962.79 ccw(c2922.22,1001.15) P9.5@2924.88,946.97 ; 2883.86,962.79 ccw(c2922.22,1001.15) P9.5@2924.88,946.97 ; 2883.86,962.79 cw(c2845.5,924.43) P9.5@2899.69,921.77 ; 2883.86,962.79 ccw(c2922.22,1001.15) P9.5@2924.88,946.97 ; 2883.86,962.79 cw(c2845.5,924.43) P9.5@2899.69,921.77 ; 2893.43,953.22 cw(c2863.75,923.54) P9.5@2905.68,921.48 ; 2893.43,953.22 ccw(c2923.12,982.91) P9.5@2925.17,940.98 ; 2893.43,953.22 ccw(c2923.12,982.91) P9.5@2925.17,940.98 ; 2893.43,953.22 cw(c2863.75,923.54) P9.5@2905.68,921.48 ; 2893.43,953.22 ccw(c2923.12,982.91) P9.5@2925.17,940.98 ; 2893.43,953.22 cw(c2863.75,923.54) P9.5@2905.68,921.48 ; 2903,943.65 cw(c2882,922.64) P9.5@2911.67,921.18 ; 2903,943.65 ccw(c2924.01,964.66) P9.5@2925.47,934.98 ; 2903,943.65 ccw(c2924.01,964.66) P9.5@2925.47,934.98 ; 2903,943.65 cw(c2882,922.64) P9.5@2911.67,921.18 ; 2903,943.65 ccw(c2924.01,964.66) P9.5@2925.47,934.98 ; 2903,943.65 cw(c2882,922.64) P9.5@2911.67,921.18 ; 2903.9,951.5 cw(c2894.95,910.06) P9.5@2935.17,923.47 ; 2903.9,951.5 cw(c2894.95,910.06) P9.5@2935.17,923.47 ; 2903.9,951.5 cw(c2894.95,910.06) P9.5@2935.17,923.47 ; 2914.19,949.28 cw(c2906.55,913.93) P9.5@2940.86,925.37 ; 2914.19,949.28 cw(c2906.55,913.93) P9.5@2940.86,925.37 ; 2914.19,949.28 cw(c2906.55,913.93) P9.5@2940.86,925.37 ; 3011.52,1689.38 ccw(c2996.1,1704.81) v1@3017.91,1704.81 ; 3011.52,1689.38 ccw(c2996.1,1704.81) v1@3017.91,1704.81 ; 3011.52,1689.38 ccw(c2996.1,1704.81) v1@3017.91,1704.81 ; 3012.07,1689.93 cw(c3026.72,1675.27) v1@3026.72,1696 ; 3012.07,1689.93 cw(c3026.72,1675.27) v1@3026.72,1696 ; 3012.07,1689.93 cw(c3026.72,1675.27) v1@3026.72,1696
PA8: P6.7 U5.67 | length 1701.6
  Top Layer w6: U5.67@2943.88,2373.14 3684.12,3113.39 ; P6.7@3740.16,3113.39 3684.12,3113.39 ; U5.67@2964.75,2396.93 ccw(c2964.75,2403.94) 2969.71,2398.98 ; U5.67@2964.75,2396.93 ccw(c2964.75,2403.94) 2969.71,2398.98 ; U5.67@2964.75,2396.93 ccw(c2964.75,2403.94) 2969.71,2398.98 ; U5.67@2967.66,2394.02 cw(c2974.67,2394.02) 2969.71,2398.98 ; U5.67@2967.66,2394.02 cw(c2974.67,2394.02) 2969.71,2398.98 ; U5.67@2967.66,2394.02 cw(c2974.67,2394.02) 2969.71,2398.98 ; 3684.12,3113.39 cw(c3684.12,3067.46) P6.7@3719.64,3096.57 ; 3684.12,3113.39 ccw(c3684.12,3159.31) P6.7@3719.64,3130.2 ; 3684.12,3113.39 ccw(c3684.12,3159.31) P6.7@3719.64,3130.2 ; 3684.12,3113.39 cw(c3684.12,3067.46) P6.7@3719.64,3096.57 ; 3684.12,3113.39 ccw(c3684.12,3159.31) P6.7@3719.64,3130.2 ; 3684.12,3113.39 cw(c3684.12,3067.46) P6.7@3719.64,3096.57 ; 3696.79,3113.39 cw(c3696.79,3077.85) P6.7@3724.28,3100.37 ; 3696.79,3113.39 ccw(c3696.79,3148.92) P6.7@3724.28,3126.4 ; 3696.79,3113.39 ccw(c3696.79,3148.92) P6.7@3724.28,3126.4 ; 3696.79,3113.39 cw(c3696.79,3077.85) P6.7@3724.28,3100.37 ; 3696.79,3113.39 ccw(c3696.79,3148.92) P6.7@3724.28,3126.4 ; 3696.79,3113.39 cw(c3696.79,3077.85) P6.7@3724.28,3100.37 ; 3709.47,3113.39 cw(c3709.47,3088.24) P6.7@3728.92,3104.18 ; 3709.47,3113.39 ccw(c3709.47,3138.54) P6.7@3728.92,3122.59 ; 3709.47,3113.39 ccw(c3709.47,3138.54) P6.7@3728.92,3122.59 ; 3709.47,3113.39 cw(c3709.47,3088.24) P6.7@3728.92,3104.18 ; 3709.47,3113.39 ccw(c3709.47,3138.54) P6.7@3728.92,3122.59 ; 3709.47,3113.39 cw(c3709.47,3088.24) P6.7@3728.92,3104.18
PA9: P6.8 U5.68 | length 3168.3
  Top Layer w6: U5.68@2929.96,2387.06 3632.87,3089.98 3632.87,3126.97 3672.24,3166.34 3781.5,3166.34 P6.8@3837.3,3110.53 ; U5.68@2950.84,2410.85 ccw(c2950.84,2417.86) 2955.8,2412.9 ; U5.68@2950.84,2410.85 ccw(c2950.84,2417.86) 2955.8,2412.9 ; U5.68@2950.84,2410.85 ccw(c2950.84,2417.86) 2955.8,2412.9 ; U5.68@2953.74,2407.94 cw(c2960.76,2407.94) 2955.8,2412.9 ; U5.68@2953.74,2407.94 cw(c2960.76,2407.94) 2955.8,2412.9 ; U5.68@2953.74,2407.94 cw(c2960.76,2407.94) 2955.8,2412.9 ; 3785.13,3162.71 ccw(c3840.16,3217.74) P6.8@3840.16,3139.91 ; 3785.13,3162.71 ccw(c3840.16,3217.74) P6.8@3840.16,3139.91 ; 3785.13,3162.71 ccw(c3840.16,3217.74) P6.8@3840.16,3139.91 ; 3795.37,3152.47 ccw(c3840.16,3197.25) P6.8@3840.16,3133.91 ; 3795.37,3152.47 ccw(c3840.16,3197.25) P6.8@3840.16,3133.91 ; 3795.37,3152.47 ccw(c3840.16,3197.25) P6.8@3840.16,3133.91 ; 3798.91,3148.93 cw(c3763.37,3113.39) P6.8@3813.63,3113.39 ; 3798.91,3148.93 cw(c3763.37,3113.39) P6.8@3813.63,3113.39 ; 3798.91,3148.93 cw(c3763.37,3113.39) P6.8@3813.63,3113.39 ; 3805.61,3142.22 ccw(c3840.16,3176.77) P6.8@3840.16,3127.91 ; 3805.61,3142.22 ccw(c3840.16,3176.77) P6.8@3840.16,3127.91 ; 3805.61,3142.22 ccw(c3840.16,3176.77) P6.8@3840.16,3127.91 ; 3806.91,3138.45 ccw(c3844.45,3148.51) P6.8@3839.74,3109.94 ; 3806.91,3138.45 ccw(c3844.45,3148.51) P6.8@3839.74,3109.94 ; 3806.91,3138.45 ccw(c3844.45,3148.51) P6.8@3839.74,3109.94 ; 3808.98,3148.12 cw(c3796.55,3100.89) P6.8@3843.5,3114.34 ; 3808.98,3148.12 cw(c3796.55,3100.89) P6.8@3843.5,3114.34 ; 3808.98,3148.12 cw(c3796.55,3100.89) P6.8@3843.5,3114.34 ; 3809.15,3138.68 cw(c3783.85,3113.39) P6.8@3819.63,3113.39 ; 3809.15,3138.68 cw(c3783.85,3113.39) P6.8@3819.63,3113.39 ; 3809.15,3138.68 cw(c3783.85,3113.39) P6.8@3819.63,3113.39 ; 3809.21,3129.87 ccw(c3843.28,3139) P6.8@3839.01,3103.98 ; 3809.21,3129.87 ccw(c3843.28,3139) P6.8@3839.01,3103.98 ; 3809.21,3129.87 ccw(c3843.28,3139) P6.8@3839.01,3103.98 ; 3811.51,3121.28 ccw(c3842.12,3129.48) P6.8@3838.28,3098.03 ; 3811.51,3121.28 ccw(c3842.12,3129.48) P6.8@3838.28,3098.03 ; 3811.51,3121.28 ccw(c3842.12,3129.48) P6.8@3838.28,3098.03 ; 3811.54,3141.58 cw(c3802.24,3106.86) P6.8@3837.67,3112.96 ; 3811.54,3141.58 cw(c3802.24,3106.86) P6.8@3837.67,3112.96 ; 3811.54,3141.58 cw(c3802.24,3106.86) P6.8@3837.67,3112.96 ; 3814.65,3134.75 ccw(c3818.83,3150.33) P6.8@3826.89,3136.36 ; 3814.65,3134.75 ccw(c3818.83,3150.33) P6.8@3826.89,3136.36 ; 3814.65,3134.75 ccw(c3818.83,3150.33) P6.8@3826.89,3136.36 ; 3815.13,3134.62 cw(c3809.36,3113.11) P6.8@3831.63,3113.31 ; 3815.13,3134.62 cw(c3809.36,3113.11) P6.8@3831.63,3113.31 ; 3815.13,3134.62 cw(c3809.36,3113.11) P6.8@3831.63,3113.31 ; 3815.85,3131.98 ccw(c3840.16,3156.28) P6.8@3840.16,3121.91 ; 3815.85,3131.98 ccw(c3840.16,3156.28) P6.8@3840.16,3121.91 ; 3815.85,3131.98 ccw(c3840.16,3156.28) P6.8@3840.16,3121.91 ; 3819.18,3145.43 cw(c3808.35,3104.27) P6.8@3849.26,3115.99 ; 3819.18,3145.43 cw(c3808.35,3104.27) P6.8@3849.26,3115.99 ; 3819.18,3145.43 cw(c3808.35,3104.27) P6.8@3849.26,3115.99 ; 3820.6,3139.15 cw(c3812.42,3108.61) P6.8@3843.58,3113.98 ; 3820.6,3139.15 cw(c3812.42,3108.61) P6.8@3843.58,3113.98 ; 3820.6,3139.15 cw(c3812.42,3108.61) P6.8@3843.58,3113.98 ; 3829.38,3142.75 cw(c3820.14,3107.65) P6.8@3855.03,3117.65 ; 3829.38,3142.75 cw(c3820.14,3107.65) P6.8@3855.03,3117.65 ; 3829.38,3142.75 cw(c3820.14,3107.65) P6.8@3855.03,3117.65
PA10: P6.5 U5.69 | length 1598.1
  Top Layer w6: U5.69@2916.04,2400.98 3615.32,3100.27 3615.32,3140.72 3687.99,3213.39 ; P6.5@3740.16,3213.39 3687.99,3213.39 ; U5.69@2936.92,2424.77 ccw(c2936.92,2431.78) 2941.88,2426.82 ; U5.69@2936.92,2424.77 ccw(c2936.92,2431.78) 2941.88,2426.82 ; U5.69@2936.92,2424.77 ccw(c2936.92,2431.78) 2941.88,2426.82 ; U5.69@2939.82,2421.86 cw(c2946.84,2421.86) 2941.88,2426.82 ; U5.69@2939.82,2421.86 cw(c2946.84,2421.86) 2941.88,2426.82 ; U5.69@2939.82,2421.86 cw(c2946.84,2421.86) 2941.88,2426.82 ; 3687.99,3213.39 cw(c3687.99,3175.36) P6.5@3718.72,3197.76 ; 3687.99,3213.39 ccw(c3687.99,3251.41) P6.5@3718.72,3229.01 ; 3687.99,3213.39 ccw(c3687.99,3251.41) P6.5@3718.72,3229.01 ; 3687.99,3213.39 cw(c3687.99,3175.36) P6.5@3718.72,3197.76 ; 3687.99,3213.39 ccw(c3687.99,3251.41) P6.5@3718.72,3229.01 ; 3687.99,3213.39 cw(c3687.99,3175.36) P6.5@3718.72,3197.76 ; 3699.79,3213.39 cw(c3699.79,3183.96) P6.5@3723.57,3201.29 ; 3699.79,3213.39 ccw(c3699.79,3242.81) P6.5@3723.57,3225.48 ; 3699.79,3213.39 ccw(c3699.79,3242.81) P6.5@3723.57,3225.48 ; 3699.79,3213.39 cw(c3699.79,3183.96) P6.5@3723.57,3201.29 ; 3699.79,3213.39 ccw(c3699.79,3242.81) P6.5@3723.57,3225.48 ; 3699.79,3213.39 cw(c3699.79,3183.96) P6.5@3723.57,3201.29
PA11: P6.6 U5.70 | length 3306.2
  Top Layer w6: U5.70@2902.12,2414.9 3601.38,3114.16 3601.38,3211.61 3652.56,3262.8 3788.39,3262.8 P6.6@3838.98,3212.2 ; U5.70@2923,2438.69 ccw(c2923,2445.7) 2927.96,2440.74 ; U5.70@2923,2438.69 ccw(c2923,2445.7) 2927.96,2440.74 ; U5.70@2923,2438.69 ccw(c2923,2445.7) 2927.96,2440.74 ; U5.70@2925.9,2435.78 cw(c2932.92,2435.78) 2927.96,2440.74 ; U5.70@2925.9,2435.78 cw(c2932.92,2435.78) 2927.96,2440.74 ; U5.70@2925.9,2435.78 cw(c2932.92,2435.78) 2927.96,2440.74 ; 3790.84,3260.34 ccw(c3840.16,3309.66) P6.6@3840.16,3239.91 ; 3790.84,3260.34 ccw(c3840.16,3309.66) P6.6@3840.16,3239.91 ; 3790.84,3260.34 ccw(c3840.16,3309.66) P6.6@3840.16,3239.91 ; 3796.54,3254.64 cw(c3755.29,3213.39) P6.6@3813.63,3213.39 ; 3796.54,3254.64 cw(c3755.29,3213.39) P6.6@3813.63,3213.39 ; 3796.54,3254.64 cw(c3755.29,3213.39) P6.6@3813.63,3213.39 ; 3801.08,3250.1 ccw(c3840.16,3289.17) P6.6@3840.16,3233.91 ; 3801.08,3250.1 ccw(c3840.16,3289.17) P6.6@3840.16,3233.91 ; 3801.08,3250.1 ccw(c3840.16,3289.17) P6.6@3840.16,3233.91 ; 3806.45,3240.17 ccw(c3846.6,3250.92) P6.6@3839.57,3209.96 ; 3806.45,3240.17 ccw(c3846.6,3250.92) P6.6@3839.57,3209.96 ; 3806.45,3240.17 ccw(c3846.6,3250.92) P6.6@3839.57,3209.96 ; 3806.79,3244.4 cw(c3775.78,3213.39) P6.6@3819.63,3213.39 ; 3806.79,3244.4 cw(c3775.78,3213.39) P6.6@3819.63,3213.39 ; 3806.79,3244.4 cw(c3775.78,3213.39) P6.6@3819.63,3213.39 ; 3808.88,3231.12 ccw(c3844.85,3240.76) P6.6@3838.56,3204.05 ; 3808.88,3231.12 ccw(c3844.85,3240.76) P6.6@3838.56,3204.05 ; 3808.88,3231.12 ccw(c3844.85,3240.76) P6.6@3838.56,3204.05 ; 3810.95,3247.74 cw(c3799.15,3203.68) P6.6@3843.54,3214.19 ; 3810.95,3247.74 cw(c3799.15,3203.68) P6.6@3843.54,3214.19 ; 3810.95,3247.74 cw(c3799.15,3203.68) P6.6@3843.54,3214.19 ; 3811.3,3222.07 ccw(c3843.11,3230.59) P6.6@3837.54,3198.14 ; 3811.3,3222.07 ccw(c3843.11,3230.59) P6.6@3837.54,3198.14 ; 3811.3,3222.07 ccw(c3843.11,3230.59) P6.6@3837.54,3198.14 ; 3811.33,3239.86 ccw(c3840.16,3268.69) P6.6@3840.16,3227.91 ; 3811.33,3239.86 ccw(c3840.16,3268.69) P6.6@3840.16,3227.91 ; 3811.33,3239.86 ccw(c3840.16,3268.69) P6.6@3840.16,3227.91 ; 3813.22,3237.3 ccw(c3841.11,3244.77) P6.6@3840.23,3215.91 ; 3813.22,3237.3 ccw(c3841.11,3244.77) P6.6@3840.23,3215.91 ; 3813.22,3237.3 ccw(c3841.11,3244.77) P6.6@3840.23,3215.91 ; 3813.49,3241.06 cw(c3804.98,3209.29) P6.6@3837.65,3213.09 ; 3813.49,3241.06 cw(c3804.98,3209.29) P6.6@3837.65,3213.09 ; 3813.49,3241.06 cw(c3804.98,3209.29) P6.6@3837.65,3213.09 ; 3815.31,3229.5 ccw(c3840.86,3236.35) P6.6@3840.05,3209.91 ; 3815.31,3229.5 ccw(c3840.86,3236.35) P6.6@3840.05,3209.91 ; 3815.31,3229.5 ccw(c3840.86,3236.35) P6.6@3840.05,3209.91 ; 3817.03,3234.15 cw(c3796.26,3213.39) P6.6@3825.63,3213.39 ; 3817.03,3234.15 cw(c3796.26,3213.39) P6.6@3825.63,3213.39 ; 3817.03,3234.15 cw(c3796.26,3213.39) P6.6@3825.63,3213.39 ; 3820.66,3245.14 cw(c3810.25,3206.31) P6.6@3849.38,3215.57 ; 3820.66,3245.14 cw(c3810.25,3206.31) P6.6@3849.38,3215.57 ; 3820.66,3245.14 cw(c3810.25,3206.31) P6.6@3849.38,3215.57 ; 3822.03,3238.77 cw(c3814.42,3210.39) P6.6@3843.61,3213.79 ; 3822.03,3238.77 cw(c3814.42,3210.39) P6.6@3843.61,3213.79 ; 3822.03,3238.77 cw(c3814.42,3210.39) P6.6@3843.61,3213.79 ; 3830.37,3242.54 cw(c3821.36,3208.94) P6.6@3855.21,3216.95 ; 3830.37,3242.54 cw(c3821.36,3208.94) P6.6@3855.21,3216.95 ; 3830.37,3242.54 cw(c3821.36,3208.94) P6.6@3855.21,3216.95
PA12: P6.3 U5.71 | length 1832.1
  Top Layer w6: U5.71@2888.2,2428.82 3589.38,3130 3589.38,3216.58 3686.18,3313.39 ; P6.3@3740.16,3313.39 3686.18,3313.39 ; U5.71@2909.08,2452.61 ccw(c2909.08,2459.62) 2914.04,2454.66 ; U5.71@2909.08,2452.61 ccw(c2909.08,2459.62) 2914.04,2454.66 ; U5.71@2909.08,2452.61 ccw(c2909.08,2459.62) 2914.04,2454.66 ; U5.71@2911.98,2449.7 cw(c2919,2449.7) 2914.04,2454.66 ; U5.71@2911.98,2449.7 cw(c2919,2449.7) 2914.04,2454.66 ; U5.71@2911.98,2449.7 cw(c2919,2449.7) 2914.04,2454.66 ; 3686.18,3313.39 cw(c3686.18,3271.74) P6.3@3719.16,3297.18 ; 3686.18,3313.39 ccw(c3686.18,3355.04) P6.3@3719.16,3329.59 ; 3686.18,3313.39 ccw(c3686.18,3355.04) P6.3@3719.16,3329.59 ; 3686.18,3313.39 cw(c3686.18,3271.74) P6.3@3719.16,3297.18 ; 3686.18,3313.39 ccw(c3686.18,3355.04) P6.3@3719.16,3329.59 ; 3686.18,3313.39 cw(c3686.18,3271.74) P6.3@3719.16,3297.18 ; 3698.39,3313.39 cw(c3698.39,3281.16) P6.3@3723.91,3300.85 ; 3698.39,3313.39 ccw(c3698.39,3345.62) P6.3@3723.91,3325.93 ; 3698.39,3313.39 ccw(c3698.39,3345.62) P6.3@3723.91,3325.93 ; 3698.39,3313.39 cw(c3698.39,3281.16) P6.3@3723.91,3300.85 ; 3698.39,3313.39 ccw(c3698.39,3345.62) P6.3@3723.91,3325.93 ; 3698.39,3313.39 cw(c3698.39,3281.16) P6.3@3723.91,3300.85 ; 3710.6,3313.39 cw(c3710.6,3290.58) P6.3@3728.66,3304.51 ; 3710.6,3313.39 ccw(c3710.6,3336.19) P6.3@3728.66,3322.26 ; 3710.6,3313.39 ccw(c3710.6,3336.19) P6.3@3728.66,3322.26 ; 3710.6,3313.39 cw(c3710.6,3290.58) P6.3@3728.66,3304.51 ; 3710.6,3313.39 ccw(c3710.6,3336.19) P6.3@3728.66,3322.26 ; 3710.6,3313.39 cw(c3710.6,3290.58) P6.3@3728.66,3304.51
PA13: P1.6 P6.4 P8.7 U5.72 | length 10882.5
  Top Layer w6: P1.6@622.83,3009.45 622.83,3416.75 769.08,3562.99 2236.7,3562.99 2302.64,3628.94 2475.79,3628.94 ; v1(2520.28,2741.73) 2784.45,2477.56 2784.45,2417.32 2802.17,2399.61 2831.14,2399.61 U5.72@2874.28,2442.74 3577.38,3145.84 3577.38,3280.13 3655.51,3358.27 3795.28,3358.27 ; P8.7@2520.28,3673.43 2475.79,3628.94 ; P6.4@3840.16,3313.39 3795.28,3358.27 ; P1.6@604.08,3028.21 ccw(c558.79,3073.49) 622.83,3073.49 ; P1.6@604.08,3028.21 ccw(c558.79,3073.49) 622.83,3073.49 ; P1.6@604.08,3028.21 ccw(c558.79,3073.49) 622.83,3073.49 ; P1.6@608.32,3023.96 ccw(c573.28,3059.01) 622.83,3059.01 ; P1.6@608.32,3023.96 ccw(c573.28,3059.01) 622.83,3059.01 ; P1.6@608.32,3023.96 ccw(c573.28,3059.01) 622.83,3059.01 ; P1.6@612.56,3019.72 ccw(c587.76,3044.52) 622.83,3044.52 ; P1.6@612.56,3019.72 ccw(c587.76,3044.52) 622.83,3044.52 ; P1.6@612.56,3019.72 ccw(c587.76,3044.52) 622.83,3044.52 ; 622.83,3044.52 ccw(c657.91,3044.52) P1.6@633.11,3019.72 ; 622.83,3044.52 ccw(c657.91,3044.52) P1.6@633.11,3019.72 ; 622.83,3044.52 ccw(c657.91,3044.52) P1.6@633.11,3019.72 ; 622.83,3059.01 ccw(c672.39,3059.01) P1.6@637.35,3023.96 ; 622.83,3059.01 ccw(c672.39,3059.01) P1.6@637.35,3023.96 ; 622.83,3059.01 ccw(c672.39,3059.01) P1.6@637.35,3023.96 ; 622.83,3073.49 ccw(c686.88,3073.49) P1.6@641.59,3028.21 ; 622.83,3073.49 ccw(c686.88,3073.49) P1.6@641.59,3028.21 ; 622.83,3073.49 ccw(c686.88,3073.49) P1.6@641.59,3028.21 ; 2475.79,3628.94 cw(c2519.16,3585.57) P8.7@2519.94,3646.9 ; 2475.79,3628.94 ccw(c2432.42,3672.31) P8.7@2493.75,3673.09 ; 2475.79,3628.94 ccw(c2432.42,3672.31) P8.7@2493.75,3673.09 ; 2475.79,3628.94 cw(c2519.16,3585.57) P8.7@2519.94,3646.9 ; 2475.79,3628.94 ccw(c2432.42,3672.31) P8.7@2493.75,3673.09 ; 2475.79,3628.94 cw(c2519.16,3585.57) P8.7@2519.94,3646.9 ; 2485.85,3639 cw(c2519.41,3605.44) P8.7@2520.02,3652.9 ; 2485.85,3639 ccw(c2452.29,3672.56) P8.7@2499.75,3673.17 ; 2485.85,3639 ccw(c2452.29,3672.56) P8.7@2499.75,3673.17 ; 2485.85,3639 cw(c2519.41,3605.44) P8.7@2520.02,3652.9 ; 2485.85,3639 ccw(c2452.29,3672.56) P8.7@2499.75,3673.17 ; 2485.85,3639 cw(c2519.41,3605.44) P8.7@2520.02,3652.9 ; 2486.47,3644.46 cw(c2529.56,3633.5) P8.7@2519.49,3676.81 ; 2486.47,3644.46 cw(c2529.56,3633.5) P8.7@2519.49,3676.81 ; 2486.47,3644.46 cw(c2529.56,3633.5) P8.7@2519.49,3676.81 ; 2488.9,3654.02 cw(c2527.05,3644.31) P8.7@2518.13,3682.65 ; 2488.9,3654.02 cw(c2527.05,3644.31) P8.7@2518.13,3682.65 ; 2488.9,3654.02 cw(c2527.05,3644.31) P8.7@2518.13,3682.65 ; 2491.31,3639.62 ccw(c2480.35,3682.71) P8.7@2523.66,3672.64 ; 2491.31,3639.62 ccw(c2480.35,3682.71) P8.7@2523.66,3672.64 ; 2491.31,3639.62 ccw(c2480.35,3682.71) P8.7@2523.66,3672.64 ; 2491.33,3663.57 cw(c2524.53,3655.13) P8.7@2516.77,3688.5 ; 2491.33,3663.57 cw(c2524.53,3655.13) P8.7@2516.77,3688.5 ; 2491.33,3663.57 cw(c2524.53,3655.13) P8.7@2516.77,3688.5 ; 2493.17,3647.32 cw(c2523.73,3639.54) P8.7@2520.53,3670.91 ; 2493.17,3647.32 cw(c2523.73,3639.54) P8.7@2520.53,3670.91 ; 2493.17,3647.32 cw(c2523.73,3639.54) P8.7@2520.53,3670.91 ; 2494.17,3646.32 ccw(c2486.39,3676.88) P8.7@2517.76,3673.68 ; 2494.17,3646.32 ccw(c2486.39,3676.88) P8.7@2517.76,3673.68 ; 2494.17,3646.32 ccw(c2486.39,3676.88) P8.7@2517.76,3673.68 ; 2495.29,3655.63 cw(c2522.8,3648.63) P8.7@2519.92,3676.88 ; 2495.29,3655.63 cw(c2522.8,3648.63) P8.7@2519.92,3676.88 ; 2495.29,3655.63 cw(c2522.8,3648.63) P8.7@2519.92,3676.88 ; 2495.91,3649.06 cw(c2519.67,3625.31) P8.7@2520.09,3658.9 ; 2495.91,3649.06 ccw(c2472.16,3672.82) P8.7@2505.75,3673.24 ; 2495.91,3649.06 ccw(c2472.16,3672.82) P8.7@2505.75,3673.24 ; 2495.91,3649.06 cw(c2519.67,3625.31) P8.7@2520.09,3658.9 ; 2495.91,3649.06 ccw(c2472.16,3672.82) P8.7@2505.75,3673.24 ; 2495.91,3649.06 cw(c2519.67,3625.31) P8.7@2520.09,3658.9 ; 2500.87,3642.05 ccw(c2491.16,3680.19) P8.7@2529.5,3671.28 ; 2500.87,3642.05 ccw(c2491.16,3680.19) P8.7@2529.5,3671.28 ; 2500.87,3642.05 ccw(c2491.16,3680.19) P8.7@2529.5,3671.28 ; 2502.49,3648.44 ccw(c2495.49,3675.95) P8.7@2523.73,3673.07 ; 2502.49,3648.44 ccw(c2495.49,3675.95) P8.7@2523.73,3673.07 ; 2502.49,3648.44 ccw(c2495.49,3675.95) P8.7@2523.73,3673.07 ; 2510.42,3644.48 ccw(c2501.98,3677.68) P8.7@2535.35,3669.92 ; 2510.42,3644.48 ccw(c2501.98,3677.68) P8.7@2535.35,3669.92 ; 2510.42,3644.48 ccw(c2501.98,3677.68) P8.7@2535.35,3669.92 ; v1@2517.15,2741.09 ccw(c2529.71,2743.66) 2526.39,2731.28 ; v1@2517.15,2741.09 ccw(c2529.71,2743.66) 2526.39,2731.28 ; v1@2517.15,2741.09 ccw(c2529.71,2743.66) 2526.39,2731.28 ; v1@2520.28,2732.92 cw(c2520.28,2711.65) 2535.32,2726.69 ; v1@2520.28,2732.92 cw(c2520.28,2711.65) 2535.32,2726.69 ; v1@2520.28,2732.92 cw(c2520.28,2711.65) 2535.32,2726.69 ; v1@2520.92,2744.86 cw(c2518.34,2732.3) 2530.73,2735.62 ; v1@2520.92,2744.86 cw(c2518.34,2732.3) 2530.73,2735.62 ; v1@2520.92,2744.86 cw(c2518.34,2732.3) 2530.73,2735.62 ; v1@2529.09,2741.73 ccw(c2550.36,2741.73) 2535.32,2726.69 ; v1@2529.09,2741.73 ccw(c2550.36,2741.73) 2535.32,2726.69 ; v1@2529.09,2741.73 ccw(c2550.36,2741.73) 2535.32,2726.69 ; 2848.44,2416.9 cw(c2853.4,2411.94) U5.72@2853.4,2418.96 ; 2848.44,2416.9 ccw(c2843.48,2421.86) U5.72@2850.49,2421.86 ; 2848.44,2416.9 ccw(c2843.48,2421.86) U5.72@2850.49,2421.86 ; 2848.44,2416.9 cw(c2853.4,2411.94) U5.72@2853.4,2418.96 ; 2848.44,2416.9 ccw(c2843.48,2421.86) U5.72@2850.49,2421.86 ; 2848.44,2416.9 cw(c2853.4,2411.94) U5.72@2853.4,2418.96 ; U5.72@2895.16,2466.53 ccw(c2895.16,2473.54) 2900.12,2468.58 ; U5.72@2895.16,2466.53 ccw(c2895.16,2473.54) 2900.12,2468.58 ; U5.72@2895.16,2466.53 ccw(c2895.16,2473.54) 2900.12,2468.58 ; U5.72@2898.06,2463.62 cw(c2905.08,2463.62) 2900.12,2468.58 ; U5.72@2898.06,2463.62 cw(c2905.08,2463.62) 2900.12,2468.58 ; U5.72@2898.06,2463.62 cw(c2905.08,2463.62) 2900.12,2468.58 ; 3795.28,3358.27 cw(c3750.97,3313.96) P6.4@3813.63,3313.56 ; 3795.28,3358.27 ccw(c3839.59,3402.57) P6.4@3839.99,3339.91 ; 3795.28,3358.27 ccw(c3839.59,3402.57) P6.4@3839.99,3339.91 ; 3795.28,3358.27 cw(c3750.97,3313.96) P6.4@3813.63,3313.56 ; 3795.28,3358.27 ccw(c3839.59,3402.57) P6.4@3839.99,3339.91 ; 3795.28,3358.27 cw(c3750.97,3313.96) P6.4@3813.63,3313.56 ; 3805.43,3348.11 cw(c3771.14,3313.83) P6.4@3819.63,3313.52 ; 3805.43,3348.11 ccw(c3839.72,3382.4) P6.4@3840.03,3333.91 ; 3805.43,3348.11 ccw(c3839.72,3382.4) P6.4@3840.03,3333.91 ; 3805.43,3348.11 cw(c3771.14,3313.83) P6.4@3819.63,3313.52 ; 3805.43,3348.11 ccw(c3839.72,3382.4) P6.4@3840.03,3333.91 ; 3805.43,3348.11 cw(c3771.14,3313.83) P6.4@3819.63,3313.52 ; 3806.24,3341.85 ccw(c3848.8,3352.97) P6.4@3839.42,3309.99 ; 3806.24,3341.85 ccw(c3848.8,3352.97) P6.4@3839.42,3309.99 ; 3806.24,3341.85 ccw(c3848.8,3352.97) P6.4@3839.42,3309.99 ; 3808.71,3332.39 ccw(c3846.46,3342.24) P6.4@3838.14,3304.13 ; 3808.71,3332.39 ccw(c3846.46,3342.24) P6.4@3838.14,3304.13 ; 3808.71,3332.39 ccw(c3846.46,3342.24) P6.4@3838.14,3304.13 ; 3811.18,3322.92 ccw(c3844.12,3331.52) P6.4@3836.86,3298.27 ; 3811.18,3322.92 ccw(c3844.12,3331.52) P6.4@3836.86,3298.27 ; 3811.18,3322.92 ccw(c3844.12,3331.52) P6.4@3836.86,3298.27 ; 3811.69,3347.3 cw(c3800.58,3304.74) P6.4@3843.55,3314.13 ; 3811.69,3347.3 cw(c3800.58,3304.74) P6.4@3843.55,3314.13 ; 3811.69,3347.3 cw(c3800.58,3304.74) P6.4@3843.55,3314.13 ; 3812.96,3339.08 ccw(c3843.11,3346.95) P6.4@3840.38,3315.9 ; 3812.96,3339.08 ccw(c3843.11,3346.95) P6.4@3840.38,3315.9 ; 3812.96,3339.08 ccw(c3843.11,3346.95) P6.4@3840.38,3315.9 ; 3814.47,3340.59 cw(c3806.59,3310.43) P6.4@3837.64,3313.16 ; 3814.47,3340.59 cw(c3806.59,3310.43) P6.4@3837.64,3313.16 ; 3814.47,3340.59 cw(c3806.59,3310.43) P6.4@3837.64,3313.16 ; 3815.11,3330.84 ccw(c3842.32,3337.94) P6.4@3839.85,3309.93 ; 3815.11,3330.84 ccw(c3842.32,3337.94) P6.4@3839.85,3309.93 ; 3815.11,3330.84 ccw(c3842.32,3337.94) P6.4@3839.85,3309.93 ; 3815.58,3337.96 cw(c3791.31,3313.7) P6.4@3825.63,3313.48 ; 3815.58,3337.96 ccw(c3839.85,3362.23) P6.4@3840.06,3327.91 ; 3815.58,3337.96 ccw(c3839.85,3362.23) P6.4@3840.06,3327.91 ; 3815.58,3337.96 cw(c3791.31,3313.7) P6.4@3825.63,3313.48 ; 3815.58,3337.96 ccw(c3839.85,3362.23) P6.4@3840.06,3327.91 ; 3815.58,3337.96 cw(c3791.31,3313.7) P6.4@3825.63,3313.48 ; 3821.15,3344.83 cw(c3811.3,3307.09) P6.4@3849.41,3315.41 ; 3821.15,3344.83 cw(c3811.3,3307.09) P6.4@3849.41,3315.41 ; 3821.15,3344.83 cw(c3811.3,3307.09) P6.4@3849.41,3315.41 ; 3822.71,3338.44 cw(c3815.6,3311.22) P6.4@3843.62,3313.69 ; 3822.71,3338.44 cw(c3815.6,3311.22) P6.4@3843.62,3313.69 ; 3822.71,3338.44 cw(c3815.6,3311.22) P6.4@3843.62,3313.69 ; 3830.62,3342.36 cw(c3822.02,3309.43) P6.4@3855.27,3316.69 ; 3830.62,3342.36 cw(c3822.02,3309.43) P6.4@3855.27,3316.69 ; 3830.62,3342.36 cw(c3822.02,3309.43) P6.4@3855.27,3316.69
  Bottom Layer w6: v1(2520.28,2741.73) P8.7@2520.28,3673.43 ; P8.7@2501.52,3654.67 cw(c2456.23,3609.38) 2520.28,3609.38 ; P8.7@2501.52,3654.67 cw(c2456.23,3609.38) 2520.28,3609.38 ; P8.7@2501.52,3654.67 cw(c2456.23,3609.38) 2520.28,3609.38 ; P8.7@2505.76,3658.91 cw(c2470.72,3623.87) 2520.28,3623.87 ; P8.7@2505.76,3658.91 cw(c2470.72,3623.87) 2520.28,3623.87 ; P8.7@2505.76,3658.91 cw(c2470.72,3623.87) 2520.28,3623.87 ; P8.7@2510,3663.15 cw(c2485.2,3638.35) 2520.28,3638.35 ; P8.7@2510,3663.15 cw(c2485.2,3638.35) 2520.28,3638.35 ; P8.7@2510,3663.15 cw(c2485.2,3638.35) 2520.28,3638.35 ; v1@2514.05,2747.96 ccw(c2499,2763) 2520.28,2763 ; v1@2514.05,2747.96 ccw(c2499,2763) 2520.28,2763 ; v1@2514.05,2747.96 ccw(c2499,2763) 2520.28,2763 ; 2520.28,2763 ccw(c2541.55,2763) v1@2526.51,2747.96 ; 2520.28,2763 ccw(c2541.55,2763) v1@2526.51,2747.96 ; 2520.28,2763 ccw(c2541.55,2763) v1@2526.51,2747.96 ; 2520.28,3609.38 cw(c2584.32,3609.38) P8.7@2539.03,3654.67 ; 2520.28,3609.38 cw(c2584.32,3609.38) P8.7@2539.03,3654.67 ; 2520.28,3609.38 cw(c2584.32,3609.38) P8.7@2539.03,3654.67 ; 2520.28,3623.87 cw(c2569.83,3623.87) P8.7@2534.79,3658.91 ; 2520.28,3623.87 cw(c2569.83,3623.87) P8.7@2534.79,3658.91 ; 2520.28,3623.87 cw(c2569.83,3623.87) P8.7@2534.79,3658.91 ; 2520.28,3638.35 cw(c2555.35,3638.35) P8.7@2530.55,3663.15 ; 2520.28,3638.35 cw(c2555.35,3638.35) P8.7@2530.55,3663.15 ; 2520.28,3638.35 cw(c2555.35,3638.35) P8.7@2530.55,3663.15